# Altium PCB Copy of Copy of keyMANDevices_ver 2.PcbDoc
Units mil, origin at the board's own origin, x right, y up, seen from the top; angles counter-clockwise.
Board outline 6000 x 4000 mil, 2 copper layers (Top Layer, Bottom Layer); 94 components, 86 nets, 368 pads, 14 vias.
Unrouted connection lines stored in the file: 171.
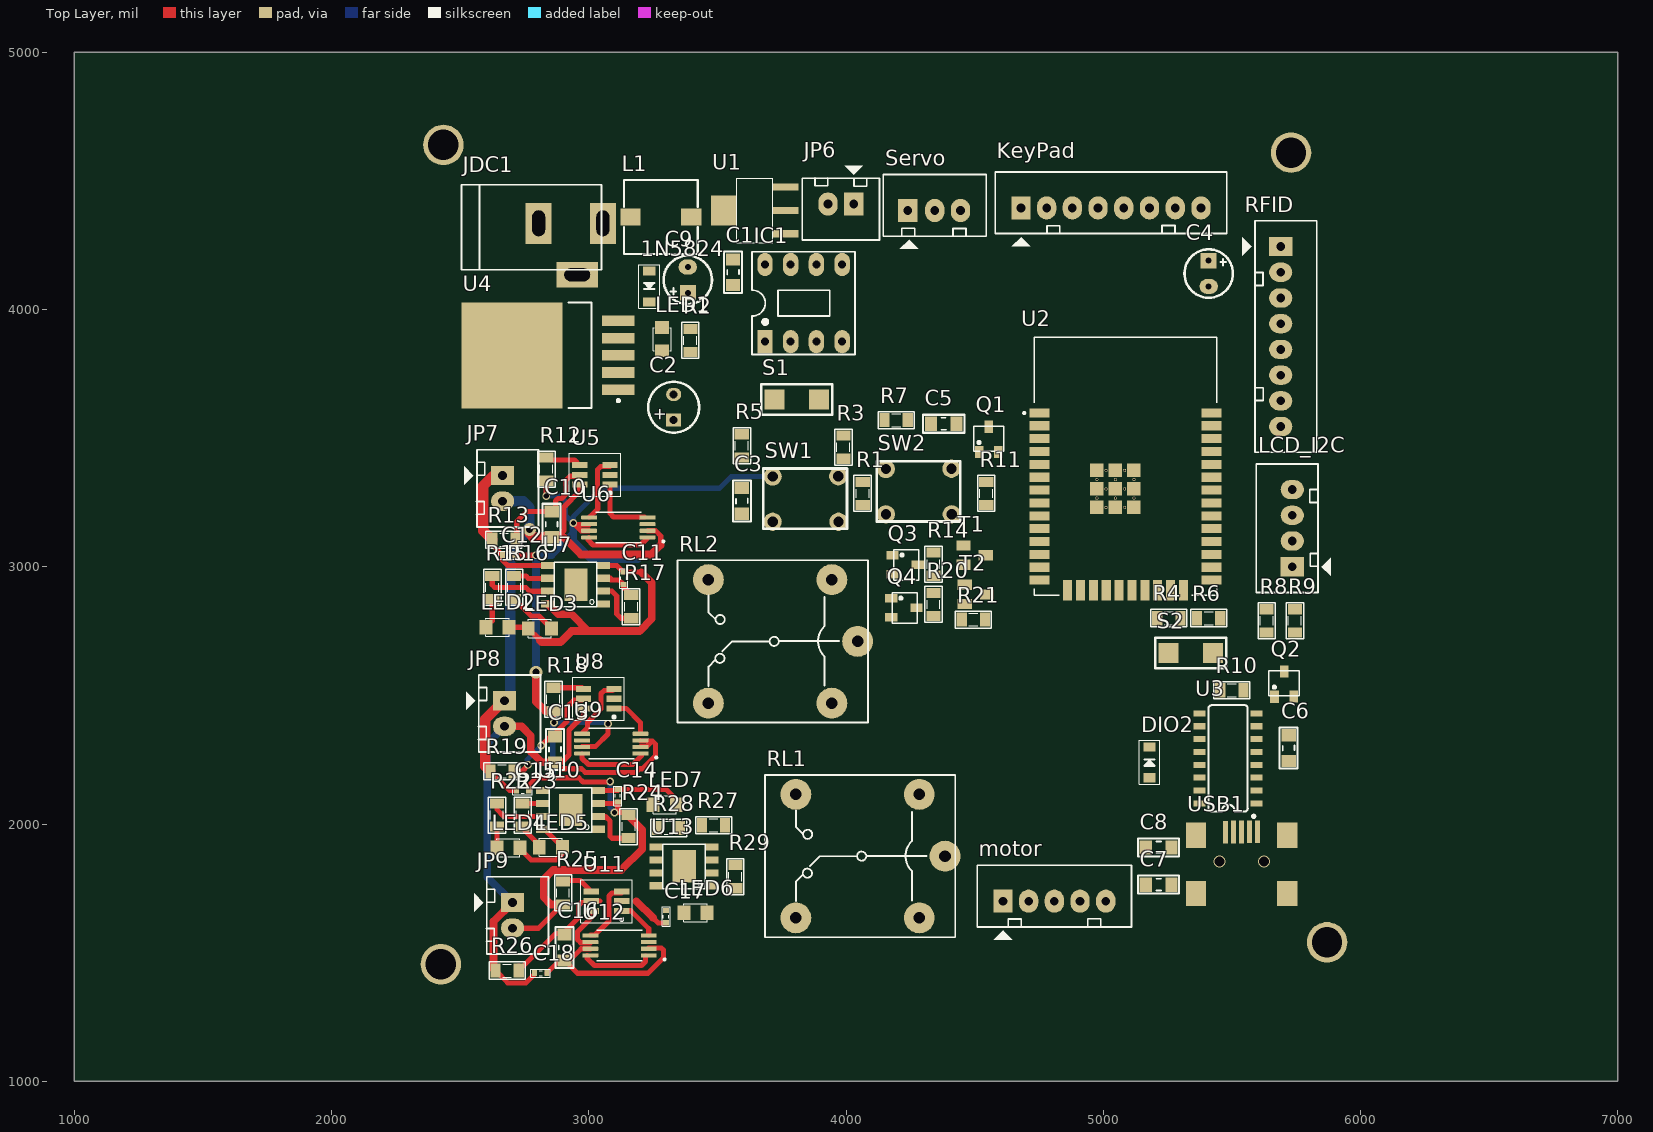
[diagram p0: Top Layer view]
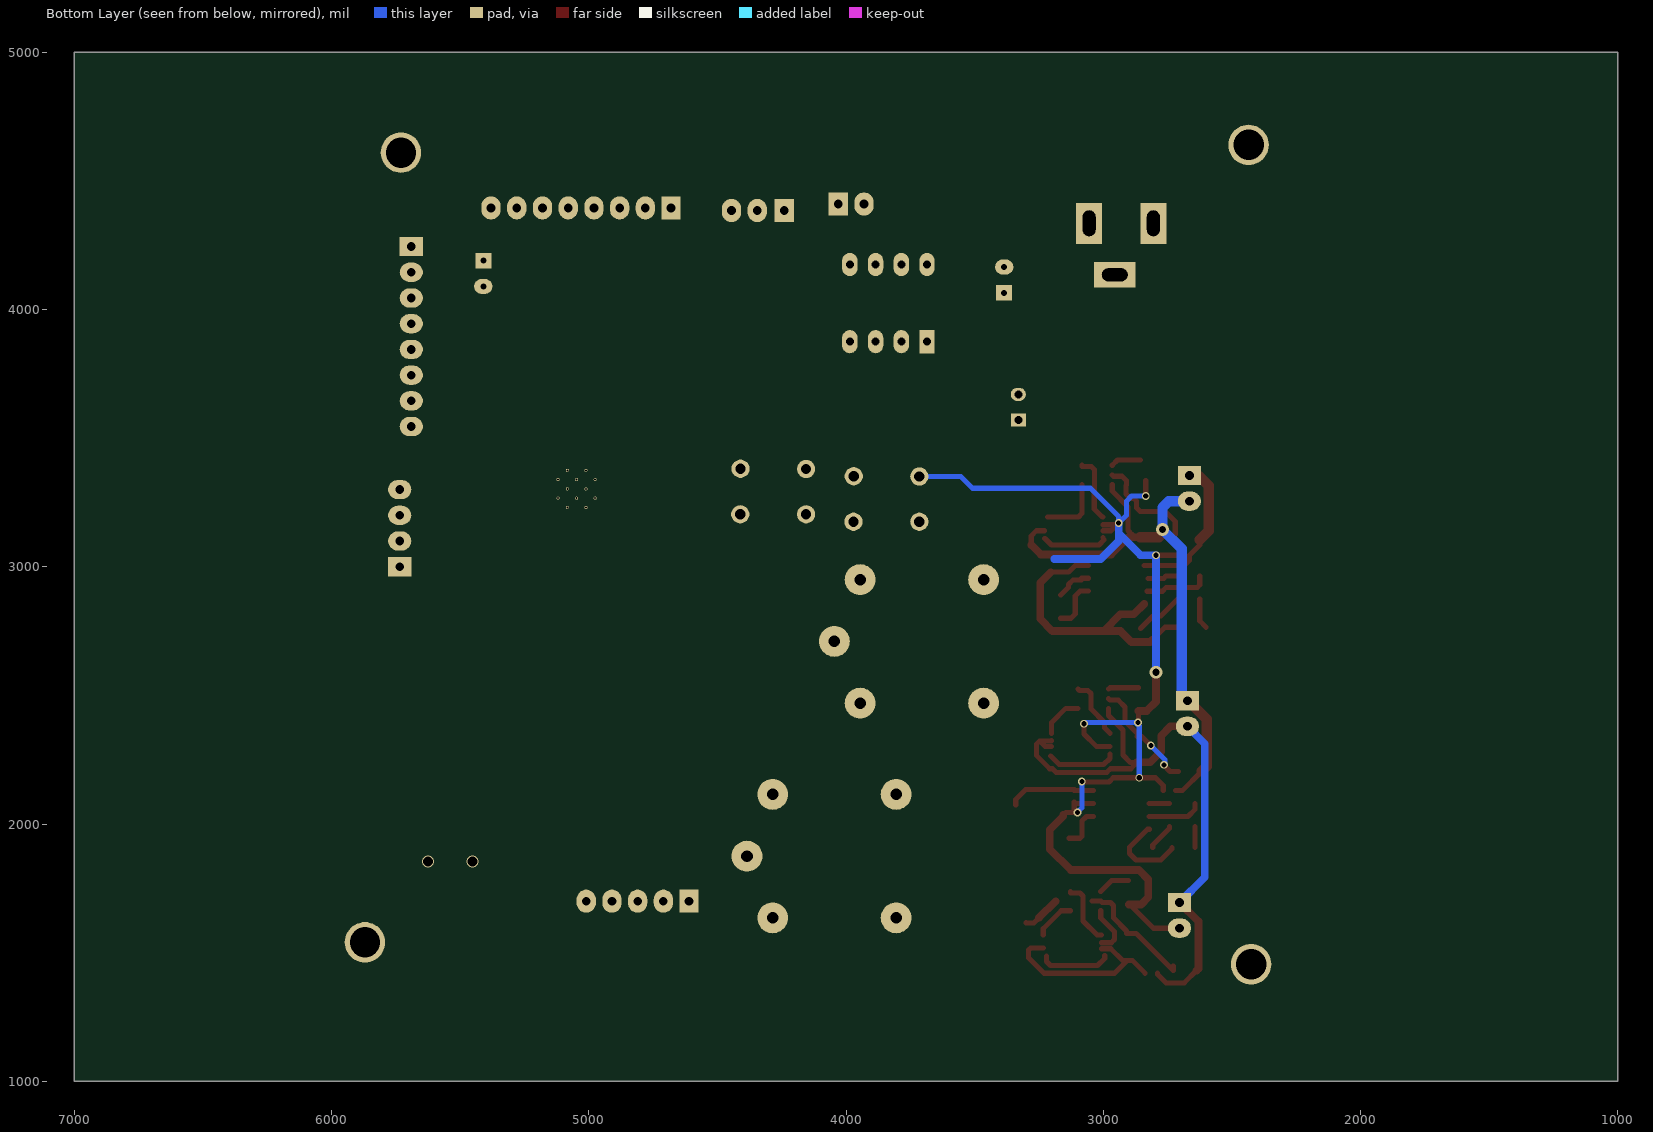
[diagram p1: Bottom Layer view, seen from below]

## Layer stack, top to bottom
Top Solder: solder mask 0.4, Solder Resist, Dk 3.5
Top Layer: signal copper 1.4
Dielectric 1: dielectric 12.6, FR-4, Dk 4.8
Bottom Layer: signal copper 1.4
Bottom Solder: solder mask 0.4, Solder Resist, Dk 3.5

## Board outline
1000,1000 7000,1000 7000,5000 1000,5000

## Design rules (kind name [scope] priority, off if disabled: settings)
Clearance [All] p1: gap=10 ignorepadtopadclearanceinfootprint=FALSE except(0: Arc-Hole Track-Hole SMDPad-Hole THPad-Hole Via-Hole Fill-Hole Poly-Hole Region-Hole Text-Hole)
PolygonConnect [All] p1: connectstyle=Relief reliefconductorwidth=10 reliefentries=4 polygonreliefangle="90 Angle" airgapwidth=10
RoutingVias [All] p1: holewidth=16 width=24 viastyle="Through Hole" minholewidth=16 minwidth=24 maxholewidth=16 maxwidth=24
SolderMaskExpansion [All] p1: expansion=4
Width [All] p1: maxlimit=40 minlimit=20 preferedwidth=30
30 further rules are at their usual default settings.

## Components (designator, comment, footprint, x,y, rotation, side; value= is the part's Value field where it differs from the comment)
1N5824 "Diode SMD" DIO-SMD-123 3235,4090 r90 top value=1N5007
C1 "104" CAP_0805 3560,4145 r90 top value=33p
C2 "680 uF" C5mm 3330,3620 r90 top
C3 "100nF" CAP_0805 3596,3256.14 r270 top value=33p
C4 "Cap Pol" C3MM 5410,4140 r270 top
C5 "100nF" CAP_0805 4380,3555 r180 top value=33p
C6 "104" CAP_0805 5720,2295 r90 top value=33p
C7 "104" CAP_0805 5215,1765 r0 top value=33p
C8 "104" CAP_0805 5215,1910 r0 top value=33p
C9 "220 uF" C3MM 3385,4115 r90 top
C10 "0.1 uF" CAP_0805 2855,3165 r90 top value=33p
C11 "10 uF" CAP_0402 3135,2955 r270 top value=33p
C12 "10 uF" CAP_0402 2689,3044.78 r0 top value=33p
C13 "0.1 uF" CAP_0805 2867.6,2289.57 r90 top value=33p
C14 "10 uF" CAP_0402 3112.6,2109.57 r270 top value=33p
C15 "10 uF" CAP_0402 2742.6,2129.57 r0 top value=33p
C16 "0.1 uF" CAP_0805 2905,1520 r90 top value=33p
C17 "10 uF" CAP_0402 3300,1640 r270 top value=33p
C18 "10 uF" CAP_0402 2813,1420 r0 top value=33p
DIO2 "Diode SMD" DIO-SMD-123 5180,2240 r270 top value=1N5007
IC1 "LM741" DIP8/W0.3 3685,3875 r0 top
JDC1 "Jac DC" DC-IN 2930,4235 r0 top
JP6 "JP2" CON2 4030,4410 r180 top value="Connector 2"
JP7 "JP2" CON2 2665,3355 r270 top value="Connector 2"
JP8 "JP2" CON2 2672.6,2479.57 r270 top value="Connector 2"
JP9 "JP2" CON2 2703.6,1695 r270 top value="Connector 2"
KeyPad "KeyPad" CON8 4680,4395 r0 top value="Connector 8"
L1 "33 uH" L-SMD-M-7.3x4.5 3280,4360 r270 top
LCD_I2C "LCD_I2C" CON4 5735,3000 r90 top value="Connector 4"
LED1 "LED" LED-0805-Red 3285,3840 r90 top value="LED 3 ly Single Colour"
LED2 "LED" LED-0805-Red 2690,2765 r180 top value="LED 3 ly Single Colour"
LED3 "LED" LED-0805-Green 2765,2760 r0 top value="LED 3 ly Single Colour"
LED4 "LED" LED-0805-Red 2732.6,1907.95 r180 top value="LED 3 ly Single Colour"
LED5 "LED" LED-0805-Green 2897.6,1909.57 r180 top value="LED 3 ly Single Colour"
LED6 "LED" LED-0805-Red 3370,1655 r0 top value="LED 3 ly Single Colour"
LED7 "LED" LED-0805-Green 3340,2075 r180 top value="LED 3 ly Single Colour"
motor "motor" CON5 4610,1700 r0 top value="Connector 5"
Q1 "2N222" SOT23D 4555,3495 r0 top value=C1815
Q2 "2N222" SOT23D 5703,2544 r0 top value=C1815
Q3 "2N222" SOT23D 4230,3007.37 r270 top value=C1815
Q4 "2N222" SOT23D 4225,2840 r270 top value=C1815
R1 "10k" RES-SMD-0805 4065,3285 r270 top
R2 "1k" RES-SMD-0805 3395,3880 r270 top
R3 "12k" RES-SMD-0805 3990,3465 r90 top
R4 "12k" RES-SMD-0805 5255,2800 r180 top
R5 "470" RES-SMD-0805 3595,3470 r90 top
R6 "470" RES-SMD-0805 5410,2800 r180 top
R7 "10k" RES-SMD-0805 4195,3570 r0 top
R8 "470" RES-SMD-0805 5635,2790 r90 top
R9 "470" RES-SMD-0805 5745,2790 r90 top
R10 "12k" RES-SMD-0805 5500,2520 r0 top
R11 "12k" RES-SMD-0805 4545,3285 r90 top
R12 "1k" RES-SMD-0805 2835,3379.62 r90 top
R13 "100" RES-SMD-0805 2670,3105 r180 top
R14 "1k" RES-SMD-0805 4340,3010 r90 top
R15 "1k" RES-SMD-0805 2625,2919.5 r90 top
R16 "1k" RES-SMD-0805 2710,2919.5 r90 top
R17 "1.2k" RES-SMD-0805 3165,2845 r270 top
R18 "1k" RES-SMD-0805 2862.6,2484.57 r90 top
R19 "100" RES-SMD-0805 2662.6,2204.57 r180 top
R20 "1k" RES-SMD-0805 4340,2853.47 r90 top
R21 "1k" RES-SMD-0805 4495,2795 r0 top
R22 "1k" RES-SMD-0805 2642.6,2034.57 r90 top
R23 "1k" RES-SMD-0805 2742.6,2034.57 r90 top
R24 "1.2k" RES-SMD-0805 3155,1990 r270 top
R25 "1k" RES-SMD-0805 2900,1731.81 r90 top
R26 "100" RES-SMD-0805 2682.6,1430 r180 top
R27 "1k" RES-SMD-0805 3485,1995 r180 top
R28 "1k" RES-SMD-0805 3310,1985 r0 top
R29 "1.2k" RES-SMD-0805 3570,1795 r270 top
RFID "RFID" CON8 5690,4245 r270 top value="Connector 8"
RL1 "Relay 10A/12V" RL_SPDT_10A 4385,1875 r180 top value="Relay SPDT, 10A, 12V"
RL2 "Relay 10A/12V" RL_SPDT_10A 4045,2710 r180 top value="Relay SPDT, 10A, 12V"
S1 "SW-SMD" "SW 3x2x4" 3808.39,3650 r0 top
S2 "SW-SMD" "SW 3x2x4" 5340,2665 r180 top
Servo "servo" CON3 4245,4385 r0 top value="Connector 3"
SW1 "SW-4P-S" SW-4P-S 3715,3351 r0 top
SW2 "SW-4P-S" SW-4P-S 4155,3380 r0 top
T1 "A03401" A3401 4500,3045 r270 top
T2 "A03401" A3401 4505,2892.84 r270 top
U1 "LM1117-ADJ" LM1117-SOP 3715,4385 r90 top
U2 "ESP32-WROOM-32" MODULE_ESP32-WROOM-32 5086.61,3390.94 r0 top
U3 "CH340C" SO016 5485,2255 r90 top
U4 "LM2976" TO-263 2878.78,3821.93 r180 top
U5 "DW01A" SOT23-6 3024.06,3357.4 r180 top
U6 "FS8205A" FS8205A 3114.87,3155 r180 top
U7 "TP4056" TP4056 2949,2930.24 r180 top
U8 "DW01A" SOT23-6 3038.54,2486.97 r180 top
U9 "FS8205A" FS8205A 3087.6,2314.57 r180 top
U10 "TP4056" TP4056 2929.33,2054.57 r180 top
U11 "DW01A" SOT23-6 3068.82,1700 r180 top
U12 "FS8205A" FS8205A 3120,1530 r180 top
U13 "TP4056" TP4056 3370,1835 r180 top
USB1 "USB_M" USB_B_MINI_SMD 5476,1968 r180 top

## Footprints (in the part's own frame and the unit in brackets; to place one, negate y for a bottom-side part, rotate by r counter-clockwise, add the part's x,y. Pads: shape width x height; smd on the part's side, far side on the other; paste and mask are expansions set on the pad)
A3401 [mm] "P-Channel 30V 4A _Ta_ 1.4W _Ta_ Surface Mount SOT-23-3"
  rect 1x1.4 smd: 1(-0.95,-1.1) 2(0.95,-1.1) 3(0,1.1)
  body extent -1.47,-1.33 1.53,1.17, height 1.06
C3MM [mm]
  rect 1.5x1.58 hole 0.6: 1(-1.27,0)
  oval 1.5x1.8 hole 0.6: 2(1.27,0)
  silkscreen extent -2.39,-2.39 2.39,2.39, body extent -2,-2.03 1.99,1.97, height 7.01
C5mm [mm]
  rect 1.3x1.5 hole 0.8: 1(-1.27,0)
  oval 1.3x1.5 hole 0.8: 2(1.27,0)
  silkscreen extent -2.51,-2.51 2.51,2.51, body extent -2.5,-2.5 2.49,2.5, height 11.01
CAP_0402 [mm]
  rect 0.5x0.6 smd: 1(-0.61,0) 2(0.61,0)
  silkscreen extent -0.97,-0.38 0.97,0.41, body extent -0.5,-0.27 0.5,0.26, height 0.35
CAP_0805 [mm]
  rect 1.2x1.4 smd: 1(-1.27,-0.025) 2(1.27,-0.025)
  silkscreen extent -2.03,-0.91 2.03,0.86, body extent -1.01,-0.66 1.01,0.61, height 0.61
CON2 [mil] "CON2"
  rect 75x90 hole 34: 1(0,0)
  oval 75x90 hole 34: 2(100,0)
  silkscreen extent -100,-150 200,140, body extent -68,-70 168,107, height 236
CON3 [mil] "CON 3"
  rect 75x90 hole 34: 1(-5,0)
  oval 75x90 hole 34: 2(100,0) 3(200,0)
  silkscreen extent -100,-150 300,140, body extent -95,-90 295,136, height 276
CON4 [mil] "CON4"
  rect 75x90 hole 34: 1(0,0)
  oval 75x90 hole 34: 2(100,0) 3(200,0) 4(300,0)
  silkscreen extent -100,-150 400,140, body extent -90,-90 398,136, height 276
CON5 [mil] "CON5"
  rect 75x90 hole 34: 1(0,0)
  oval 75x90 hole 34: 2(100,0) 3(200,0) 4(300,0) 5(400,0)
  silkscreen extent -100,-150 500,140
CON8 [mil] "CON8"
  rect 75x90 hole 34: 1(0,0)
  oval 75x90 hole 34: 2(100,0) 3(200,0) 4(300,0) 5(400,0) 6(500,0) 7(600,0) 8(700,0)
  silkscreen extent -100,-150 800,140
DC-IN [mil] "Jac DC input"
  rect 100x160 hole 50 slot 100 at 90 deg: 1(125,100) 2(-125,100)
  rect 160x100 hole 50 slot 100 at 0 deg: 3(25,-100)
  silkscreen extent -425,-80 120,250, body extent -410,-105 134,269, height 434
DIO-SMD-123 [mm]
  rect 0.9x1.2 smd: 1(1.524,0) 2(-1.524,0)
  silkscreen extent -2.16,-1.02 2.16,1.02, body extent -1.76,-0.8 1.94,0.8, height 1.25
DIP8/W0.3 [mil] "8 PIN, W 300mil, Pin to pin 100mil"
  rect 60x90 hole 31: 1(0,0)
  oval 60x90 hole 31: 2(100,0) 3(200,0) 4(300,0) 5(300,300) 6(200,300) 7(100,300) 8(0,300)
  silkscreen extent -50,-50 350,350, body extent -50,-40 350,336, height 201
FS8205A [mm]
  rrect25% 1.56x0.4 smd: 1(-2.88,1.031) 2(-2.88,0.381) 3(-2.88,-0.269) 4(-2.88,-0.919) 5(2.88,-0.919) 6(2.88,-0.269) 7(2.88,0.381) 8(2.88,1.031)
  silkscreen extent -4.54,-1.46 2.25,1.57, body extent -3.2,-1.4 3.2,1.53, height 1.2
L-SMD-M-7.3x4.5 [mm] "WE-PDA SMD Shielded Power Inductor, 7345"
  rect 1.7x2 smd: 1(0,3) 2(0,-3)
  silkscreen extent -3.65,-3.65 3.65,3.65, body extent -3.65,-3.65 3.65,3.65, height 4.05
LED-0805-Green [mil]
  rect 50x55 smd: 1(0,0) 2(90,0)
  silkscreen extent 0,-35 90,35, body extent 5,-25 85,25, height 43
LED-0805-Red [mil]
  rect 50x55 smd: 1(0,0) 2(90,0)
  silkscreen extent 0,-35 90,35, body extent 5,-25 85,25, height 43
LM1117-SOP [mm]
  rect 0.7x2.54 smd: 1(-2.3,-1.27) 2(0,-1.27) 3(2.3,-1.27)
  rect 3x2.54 smd: 2(0,4.826)
  silkscreen extent -3.18,0 3.17,3.56, body extent -3.25,-1.78 3.25,5.18, height 1.68
MODULE_ESP32-WROOM-32 [mm]
  rect 2x0.9 smd: 1(-8.5,5.26) 2(-8.5,3.99) 3(-8.5,2.72) 4(-8.5,1.45) 5(-8.5,0.18) 6(-8.5,-1.09) 7(-8.5,-2.36) 8(-8.5,-3.63) 9(-8.5,-4.9) 10(-8.5,-6.17) 11(-8.5,-7.44) 12(-8.5,-8.71) 13(-8.5,-9.98) 14(-8.5,-11.25) 25(8.5,-11.25) 26(8.5,-9.98) 27(8.5,-8.71) 28(8.5,-7.44) 29(8.5,-6.17) 30(8.5,-4.9) 31(8.5,-3.63) 32(8.5,-2.36) 33(8.5,-1.09) 34(8.5,0.18) 35(8.5,1.45) 36(8.5,2.72) 37(8.5,3.99) 38(8.5,5.26)
  rect 0.9x2 smd: 15(-5.715,-12.25) 16(-4.445,-12.25) 17(-3.175,-12.25) 18(-1.905,-12.25) 19(-0.635,-12.25) 20(0.635,-12.25) 21(1.905,-12.25) 22(3.175,-12.25) 23(4.445,-12.25) 24(5.715,-12.25)
  rect 1.33x1.33 smd: 39_1(-2.835,-0.405) 39_2(-1,-0.405) 39_3(0.835,-0.405) 39_4(-2.835,-2.24) 39_5(-1,-2.24) 39_6(0.835,-2.24) 39_7(-2.835,-4.075) 39_8(-1,-4.075) 39_9(0.835,-4.075)
  round 0.3 hole 0.2: 39_10(-1.917,-0.405) 39_11(-0.082,-0.405) 39_12(-2.835,-1.322) 39_13(-1,-1.322) 39_14(0.835,-1.322) 39_15(-1.917,-2.24) 39_16(-0.082,-2.24) 39_17(-2.835,-3.157) 39_18(-1,-3.157) 39_19(0.835,-3.157) 39_20(-1.917,-4.075) 39_21(-0.082,-4.075)
  silkscreen extent -10.1,-12.75 9,12.75, body extent -10.54,-12.75 8.98,12.75, height 3.2
RES-SMD-0805 [mil]
  rect 39.37x55 smd: 1(-45,0) 2(45,0)
  silkscreen extent -70,-34 70,33, body extent -39,-25 39,25, height 31
RL_SPDT_10A [mil] "Relay SPDT, 5 pin, 10A,W 650mil, L 800mil, H 800mil"
  round 120 hole 45: 1(0,0) 2(580,240) 3(580,-240) 4(100,-240) 5(100,240)
  silkscreen extent -40,-315 700,315
SO016 [mm]
  rect 0.6x1.2 smd: 1(-4.445,-2.8) 2(-3.175,-2.8) 3(-1.905,-2.8) 4(-0.635,-2.8) 5(0.635,-2.8) 6(1.905,-2.8) 7(3.175,-2.8) 8(4.445,-2.8) 9(4.445,2.8) 10(3.175,2.8) 11(1.905,2.8) 12(0.635,2.8) 13(-0.635,2.8) 14(-1.905,2.8) 15(-3.175,2.8) 16(-4.445,2.8)
  silkscreen extent -5.84,-2.67 5.26,1.95
SOT23-6 [mm] "SOT23, 5-Leads, Body 3.0x3.0mm (max), Pitch 0.95mm, IPC Medium Density"
  rect 1.5x0.6 smd: 1(-1.5,0.95) 2(-1.5,0) 3(-1.5,-0.95) 4(1.5,-0.95) 5(1.5,0) 6(1.5,0.95)
  silkscreen extent -2.54,-2.11 2.54,2.11, body extent -1.75,-1.52 1.75,1.53, height 1.45
SOT23D [mm] "SOT 23C - 1-3-2 - BCE"
  rect 0.85x1.2 smd: 1(-0.95,-1.25) 2(0.94,-1.245) 3(0,1.25)
  silkscreen extent -1.5,-1.14 1.5,1.32, body extent -1.5,-1.17 1.5,1.33, height 1.06
"SW 3x2x4" [mm]
  rect 2x2 smd: 1(-2.2,0) 2(2.2,0)
  silkscreen extent -3.5,-1.5 3.5,1.5, body extent -2.45,-1.45 2.45,1.45, height 2
SW-4P-S [mm]
  round 1.8 hole 1: 1(0,0) 2(0,-4.47) 3(6.502,-4.47) 4(6.477,0.025)
  silkscreen extent -0.91,-5.18 7.34,0.79, body extent -0.86,-5.23 7.35,0.76, height 9.52
TO-263 [mm]
  rect 3.2x1.05 smd: 1(-6,3.4) 2(-6,1.7) 3(-6,0) 4(-6,-1.7) 5(-6,-3.4)
  rect 10x10.45 smd: 6(4.5,0)
  silkscreen extent -6.13,-5.2 -1.1,5.2, body extent -6.58,-5.2 7.57,5.2, height 4.65
TP4056 [mm]
  rect 1.3x0.7 smd: 1(-2.75,1.905) 2(-2.75,0.635) 3(-2.75,-0.635) 4(-2.75,-1.905) 5(2.75,-1.905) 6(2.75,-0.635) 7(2.75,0.635) 8(2.75,1.905)
  rect 2.3x3.2 smd: GND(-0.025,0)
  silkscreen extent -2.1,-2.2 2.1,2.2, body extent -3.13,-2.45 2.87,2.45, height 1.75
USB_B_MINI_SMD [mm]
  rect 2x2.5 smd: 0(-6.075,0.305) 0(-6.071,6.045) 0(2.925,0.305) 0(2.929,6.045)
  rect 0.5x2.25 smd: 1(0,0) 2(-0.787,-0.013) 3(-1.575,-0.025) 4(-2.362,-0.038) 5(-3.15,-0.051)
  body extent -6.92,-0.37 3.78,8.83, height 3.95

## Part data
1N5824 DIO2: "Default Diode", Code - JEDEC=DO-214-AB, Published=8-Jun-2000, Publisher="Altium Limited", Revision="July-2002: Re-released for DXP Platform."
C1 C3 C5 C6 C7 C8 C10 C11 C12 C13 C14 C15 C16 C17 C18: library part CapSMD, "Capacitor", LatestRevisionDate=17-Jul-2002, LatestRevisionNote="Re-released for DXP Platform.", PackageReference=RAD-0.3, Published=8-Jun-2000, Publisher="Altium Limited"
C2 C9: library part "Cap Pol", "Polarized Capacitor (Axial)", LatestRevisionDate=17-Jul-2002, LatestRevisionNote="Re-released for DXP Platform.", PackageReference=POLAR0.8, Published=8-Jun-2000, Publisher="Altium Limited"
C4: "Polarized Capacitor (Axial)", LatestRevisionDate=17-Jul-2002, LatestRevisionNote="Re-released for DXP Platform.", PackageReference=POLAR0.8, Published=8-Jun-2000, Publisher="Altium Limited"
IC1: "Single OA"
JDC1: library part DCIN, "Jac DC input"
JP6 JP7 JP8 JP9: library part Con2, "Connector 2"
KeyPad RFID: library part Con8, "Connector 8"
L1: library part L-SMD-1, Inductance="1.0 µH", Manufacturer="Wurth Elektronik", partNo=78477010, ComponentLink1Description=Manufacturer, ComponentLink1URL=http://www.we-online.de, ComponentLink2Description=Datasheet, ComponentLink2URL=http://katalog.we-online.de/pbs/datasheet/78477010.pdf, Created by="Baojun Chen", Created Date=Nov.2015
LCD_I2C: library part Con4, "Connector 4"
LED1 LED2 LED3 LED4 LED5 LED6 LED7: "LED Single colour Green and Red"
motor: library part Con5, "Connector 5"
Q1 Q2 Q3 Q4: "NPN 600mW, ECB", =C2383
R1 R2 R3 R4 R5 R6 R7 R8 R9 R10 R11 R12 R13 R14 R15 R16 R17 R18 R19 R20 R21 R22 R23 R24 R25 R26 R27 R28 R29: library part "Resistor - SMD", "Resistor", Manufacturer="Generic Components", Class=Passive, Published=08/06/2000, Publisher="Altium Hobart Technology Centre"
RL1 RL2: library part "Relay 1", "Relay SPDT,10A - 12VDC 5 Pin", ="Relay SPDT, 10A, 24V"
S1 S2: "Switch", LatestRevisionDate=17-Jul-2002, LatestRevisionNote="Re-released for DXP Platform.", PackageReference=SPST-2, Published=24-Mar-1999, Publisher="Altium Limited"
Servo: library part Con3, "Connector 3"
SW1 SW2: library part SW-4PIN-SMALL, "Switch Small 4 Pin", LatestRevisionDate=17-Jul-2002, LatestRevisionNote="Re-released for DXP Platform.", PackageReference=SPST-2, Published=24-Mar-1999, Publisher="Altium Limited"
T1 T2: "P-Channel 30V 4A _Ta_ 1.4W _Ta_ Surface Mount SOT-23-3"
U1: "800mA Low-Dropout Linear Regulator", Creator="Nguyen Ba Bien", Website=http://group3i.net
U2: "Bluetooth, WiFi Transceiver Module 2.4GHz ~ 2.5GHz Surface Mount", Package="Module Espressif Systems", Digi-Key_Part_Number=1904-1010-1-ND, Digi-Key_Purchase_URL=https://www.digikey.com/product-detail/en/espressif-systems/ESP32-WROOM-32/1904-1010-1-ND/8544305?utm_source=snapeda&utm_medium=aggregator&utm_campaign=symbol, MF="Espressif Systems", MP=ESP32-WROOM-32, SnapEDA_Link=https://www.snapeda.com/parts/ESP32-WROOM-32/Espressif%20Systems/view-part/2753322/?ref=snap
U3: "USB to serial chip CH340", Package=Package, Availability=Unavailable, Check_prices=https://www.snapeda.com/parts/CH340C/WCH/view-part/5428851/?ref=eda, MF=WCH, MP=CH340C, Price=None, SnapEDA_Link=https://www.snapeda.com/parts/CH340C/WCH/view-part/5428851/?ref=snap
U4: library part LM2596, Max Input Voltage="12 V", Max Output Current="3 (6.0 peak) A", Max Output Voltage=mV, Temperature Range="-40 to +125 degC", Category=IC-Power, Min Input Voltage=mV, Min Output Voltage=mV, Mounting Technology="Surface Mount", Status=Unreleased, Supply Voltage=mV
U5 U8 U11: "One Cell Lithium-ion/Polymer Battery Protection IC"
U7 U10 U13: "Complete single cell Li-Ion battery with a constant current / constant voltage linear charger"

## Free pads (board coordinates)
  round 157.48 hole 118.11: 6(5730,4610) 7(5870,1540) 8(2425,1455) 9(2435,4640)

## Via types
v1: diameter 30, hole 20, Top Layer to Bottom Layer, 10 vias
v2: diameter 50, hole 28, Top Layer to Bottom Layer, 2 vias
v3: diameter 47.24, hole 39.37, Top Layer to Bottom Layer, 2 vias

## Nets (pads, with @x,y where several pads share a name; then routed paths per layer and width w, separated by ;. In a path a pad name is that pad's centre, name@x,y a point inside that pad or via, vN(x,y) a via of type N, cw(c..) or ccw(c..) an arc to the next point about the centre after c; other vN are vias at no path point)
AccessPoint: C5.2 R7.2 SW2.2 SW2.3 U2.7
ADC2_CH8: C13.1 C18.1 JP8.2 JP9.1 R26.2 U2.10 U8.6 U9.2 U9.3 U13.5 | length 2414.2
  Top Layer w20: R26.2 2685.1,1382.5 2755.57,1382.5 2789,1415.93 C18.1 ; C13.1 2893.17,2215 2971.78,2215 2986,2200.79 3183.22,2200.79 3197.43,2215 3207.72,2215 3260,2267.28 3260,2310 3247.12,2322.88 ; C13.1@2869.07,2239.57 2894.57,2239.57 2923.5,2268.5 2923.5,2365.76 2979.49,2421.74 U8.6 ; U9.2@3200.98,2301.85 3226.1,2301.85 3247.12,2322.88 ; U9.3 3200.98,2322.88 3247.12,2322.88
  Top Layer w30: R26.2 2630,1437.6 2630,1621.4 JP9.1 ; JP8.2 2738.46,2379.57 2775,2343.03 2775,2282.07 2817.5,2239.57 C13.1
  Bottom Layer w30: JP8.2 2605,2311.97 2605,1793.6 JP9.1 JP9.1@2690,1695
BOOT: Q2.3 R4.1 R6.2 U2.25
COL1: KeyPad.5 U2.24
COL2: KeyPad.6 U2.26
COL3: KeyPad.7 U2.27
COL4: KeyPad.8 U2.28
Control: C3.2 R1.2 SW1.2 SW1.3 U2.6
control1: R14.2 T1.1 U2.11
control2: R20.2 T2.1 U2.12
"Control Charge": IC1.6 RL2.4
DTR: Q2.2 R10.2 U3.13
EN: Q1.3 R3.1 R5.2 U2.3
Encoder: motor.3 U2.9
G11: U5.1 U6.4 | length 252.3
  Top Layer w20: U5.1 3083.11,3206.89 3096.54,3193.46 U6.4@3216.77,3193.46
G12: U8.1 U9.4 | length 167.4
  Top Layer w20: U8.1 3145.43,2449.57 3200.98,2394.02 U9.4@3200.98,2353.03
G13: U11.1 U12.4 | length 158.6
  Top Layer w20: U11.1 3163.38,1662.6 3233.39,1592.6 U12.4@3233.39,1568.46
G21: U5.3 U6.5 | length 259.6
  Top Layer w20: U6.5@3001.49,3193.46 3003.46,3193.46 3035,3225 3035,3298.49 3033.58,3299.9 3033.58,3377.5 3045.3,3389.21 3083.11,3389.21 U5.3
G22: U8.3 U9.5 | length 241.3
  Top Layer w20: U9.5@2974.21,2353.03 2995,2373.82 2995,2394.83 3048.07,2447.9 3048.07,2507.07 3059.79,2518.78 3092.01,2518.78 U8.3
G23: U11.3 U12.5 | length 251.2
  Top Layer w20: U12.5@3006.61,1568.46 3023.46,1568.46 3078.34,1623.35 3078.34,1720.1 3090.06,1731.81 3127.87,1731.81 U11.3
GND: 1N5824.1 C1.1 C2.2 C3.1 C4.2 C5.1 C6.1 C7.1 C8.1 C9.2 C11.2 C12.2 C14.2 C15.2 C16.1 C17.2 C18.2 IC1.2 JDC1.2 JDC1.3 JP6.2 JP9.2 LCD_I2C.1 LED1.2 motor.5 R12.1 R17.1 R18.1 R21.2 R24.1 R25.1 R29.1 RFID.3 RL1.5 RL2.5 S1.2 S2.2 Servo.3 SW1.1 SW1.4 SW2.1 SW2.4 U1.1 U2.1 U2.15 U2.38 U2.39_1 U2.39_2 U2.39_3 U2.39_4 U2.39_5 U2.39_6 U2.39_7 U2.39_8 U2.39_9 U2.39_10 U2.39_11 U2.39_12 U2.39_13 U2.39_14 U2.39_15 U2.39_16 U2.39_17 U2.39_18 U2.39_19 U2.39_20 U2.39_21 U3.1 U4.3 U4.5 U6.6 U6.7 U7.3 U9.6 U9.7 U10.3 U11.6 U12.2 U12.3 U12.6 U12.7 U13.3 USB1.5 | length 5943.9
  Top Layer w20: JP9.2 2805,1595 R25.1@2883.22,1673.22 ; C12.2 v1(2795,3044.78) ; C15.2 2766.6,2150 2796.6,2180 v1(2860,2180) 2960.91,2180 2977.34,2163.57 v1@3083.11,2163.57 ; v1(2835,3275) R12.1 ; C18.2 2887,1470 C16.1 ; R18.1 2862.6,2402.08 v1@2865,2399.68 ; v1(2940,3170) v1@2946.69,3163.31 ; U9.7@2974.21,2301.85 3026.85,2301.85 3075,2350 v1(3075,2390) ; U6.7 2970,3140 v1@2946.69,3163.31 ; U6.6@3001.49,3163.31 v1@2946.69,3163.31 ; U12.7 2970.59,1515 2925.59,1470 C16.1 ; U12.6@3006.61,1538.31 2968.77,1538.31 2955.91,1551.18 2955.91,1581.19 3009.76,1635.04 U11.6 ; U10.3 3106.6,2079.57 C14.2 3112.6,2057.6 v1(3100,2045) 3145,2045 R24.1 ; U7.3 3084.76,2955.24 3084.76,2949.16 3116.84,2949.16 C11.2 3135,2920 R17.1 ; U12.2@3233.39,1517.28 3282.67,1517.28 3290,1509.96 3290,1480 3230,1420 2956,1420 C16.1 ; 3250,1635 3270,1615 3299,1615 C17.2
  Top Layer w30: v2(2795,2590) 2795,2475 2830.43,2439.57 R18.1 ; R25.1 2853.19,1686.81 2825,1715 2825,1784.35 2862.14,1821.49 3126.49,1821.49 3207.5,1902.5 3207.5,1977.54 3155,2030.04 R24.1 ; 3185.03,1699.97 3250,1635
  Bottom Layer w20: v1(2835,3275) 2890,3275 2910,3255 2910,3200 v1@2932.5,3177.5 ; v1(2860,2180) 2860,2380 2870,2390 v1(2865,2395) 3070,2395 v1(3075,2390) ; v1(2940,3170) 2940,3195 3050,3305 3508,3305 3554,3351 SW1.1 ; v1(3083.11,2165) 3083.11,2063.11 3100,2046.22 v1(3100,2045)
  Bottom Layer w30: v2@2795,2600 v1(2795,3044.78) 2854.78,3044.78 2940,3130 ; v1(2940,3170) 2940,3130 ; 3190,3030 3010,3030 2940,3100 2940,3130
IRQ: RFID.4
Led3: LED7.2 R28.1
MISO: RFID.5 U2.31
MOSI: RFID.6 U2.37
motor1: motor.2 T1.2
motor2: motor.1 T2.2
Net1N5824_2: 1N5824.2 L1.1 U4.2
NetC6_2: C6.2 U3.4
NetC10_2: C10.2 R13.1 U5.5 | length 419.4
  Top Layer w20: R13.1@2720,3125 2720,3176.4 2758.6,3215 C10.2 2870,3229 2870,3255.77 2880,3265.77 2894.02,3265.77 2911.6,3283.35 2911.6,3315.68 2910,3317.28 2910,3334.62 2927.19,3351.81 2959.41,3351.81 U5.5
NetC13_2: C13.2 R19.1 U8.5 | length 445.4
  Top Layer w20: R19.1 2740,2204.57 2763.6,2228.17 v1(2763.6,2230) ; v1(2815,2305) 2849.57,2339.57 C13.2 2862.66,2345.51 2862.66,2347.34 2893.5,2378.18 2915,2399.68 2915,2454.71 2941.68,2481.38 2973.9,2481.38 U8.5
  Bottom Layer w20: v1@2760,2235 2760,2250 v1(2815,2305)
NetC16_2: C16.2 R26.1 U11.5 | length 477.9
  Top Layer w20: R26.1@2727.6,1447.6 R26.1 2872.6,1575 2909.45,1575 2909.45,1584.45 2960.23,1635.24 2960.23,1682.69 2971.95,1694.41 3004.17,1694.41 U11.5 3042.75,1700
NetDIO2_1: DIO2.1 USB1.1
NetLED1_1: LED1.1 R2.2
NetLED2_2: LED2.2 R15.1 | length 119.9
  Top Layer w20: LED2.2 2625,2790 R15.1
NetLED3_2: LED3.2 R16.1 | length 192.4
  Top Layer w20: R16.1 2776.03,2808.46 2806.54,2808.46 LED3.2
NetLED4_2: LED4.2 R22.1 | length 81.6
  Top Layer w20: LED4.2 R22.1
NetLED5_2: LED5.2 R23.1 | length 106.9
  Top Layer w20: R23.1 2742.6,1983.44 2807.6,1918.44 LED5.2
NetLED6_2: LED6.2 R27.1
NetQ1_1: Q1.1 R10.1
NetQ2_1: Q2.1 R11.1
NetQ3_1: Q3.1 R14.1
NetQ4_1: Q4.1 R20.1
NetR5_1: R5.1 S1.1
NetR6_1: R6.1 S2.1
NetR8_1: R8.1 U3.2
NetR9_1: R9.1 U3.3
NetR12_2: R12.2 U5.4 | length 118.4
  Top Layer w20: R12.2@2855,3415 2944.8,3415 U5.4
NetR15_2: R15.2 U7.7 | length 250.3
  Top Layer w20: R15.2 2625,2929.18 2634.18,2920 2755,2920 2770,2905 U7.7@2830,2905
NetR16_2: R16.2 U7.6 | length 118.9
  Top Layer w20: R16.2 2755.5,2964.5 2765,2955 U7.6@2825,2955
NetR17_2: R17.2 U7.2 | length 192.1
  Top Layer w20: U7.2 3089.35,2905.24 3108.76,2885.84 3108.76,2816.24 3125,2800 R17.2
NetR18_2: R18.2 U8.4 | length 119
  Top Layer w20: R18.2 2974.29,2529.57 U8.4
NetR22_2: R22.2 U10.7 | length 212.4
  Top Layer w20: R22.2 2642.6,2057.04 2670.07,2029.57 U10.7
NetR23_2: R23.2 U10.6 | length 78.5
  Top Layer w20: R23.2 U10.6
NetR24_2: R24.2 U10.2 | length 165.3
  Top Layer w20: U10.2 3065.43,2029.57 3083.19,2011.81 3083.19,1951.81 3090.43,1944.57 R24.2@3132.53,1944.57
NetR25_2: R25.2 U11.4 | length 124.8
  Top Layer w20: R25.2@2902.6,1780 2967.16,1780 U11.4
NetR27_2: R27.2 U13.7
NetR28_2: R28.2 U13.6
NetR29_2: R29.2 U13.2
NetU6_1: U6.1 U6.8 | length 251.5
  Top Layer w20: 2996.49,3105 3016.71,3084.77 3200.91,3084.77 3226.13,3110 U6.1@3228.26,3110 ; U6.8@3001.49,3113.51 U6.8
NetU9_1: U9.1 U9.8 | length 271.7
  Top Layer w20: U9.8@2974.21,2271.7 2974.21,2255 2998.42,2230.79 3170.79,2230.79 3205,2265
NetU12_1: U12.1 U12.8 | length 277.8
  Top Layer w20: U12.8@2994.21,1489.41 2994.21,1477.64 3021.85,1450 3205,1450 3220.98,1465.98 U12.1@3220.98,1487.13
OUT+: C12.1 JP6.1 JP7.1 R13.2 RL1.2 U7.5 | length 596.3
  Top Layer w20: R13.2 2625,3084.77 C12.1 2665,3025 2684.76,3005.24 U7.5
  Top Layer w40: R13.2 2590,3140 2590,3314.62 2630.38,3355 JP7.1
pin: IC1.3 U2.8
PIN1-: C10.1 C15.1 JP7.2 JP8.1 R19.2 U5.6 U6.2 U6.3 U10.5 | length 2254
  Top Layer w20: R19.2 2692.6,2129.57 C15.1 ; C10.1@2880,3115 2887.33,3122.33 2887.33,3124.76 2903.56,3140.99 2903.56,3232.88 2965,3294.32 U5.6 ; U6.2 3260,3140 3280,3120 3280,3085
  Top Layer w30: C10.1 2880,3115 2902.19,3115 2969.16,3048.03 3243.03,3048.03 3280,3085
  Top Layer w40: R19.2 2597.6,2224.57 2597.6,2407.53 2669.64,2479.57 JP8.1 ; v2(2770,3145) 2770,3129.6 2784.6,3115 C10.1
  Bottom Layer w40: JP7.2 2745,3255 2770,3230 v2@2770,3155 ; JP8.1 2695,2501.97 2695,3070 v2(2770,3145)
ROW1: KeyPad.1 U2.13
ROW2: KeyPad.2 U2.14
ROW3: KeyPad.3 U2.16
ROW4: KeyPad.4 U2.23
RST: RFID.2
RTS: Q1.2 R11.2 U3.14
RX0: R8.2 U2.34
SCK: RFID.7 U2.30
SCL_I2C: LCD_I2C.4 U2.36
SDA_I2C: LCD_I2C.3 U2.33
servo: Q3.2 Q4.2 R21.1 Servo.1
Source: C2.1 RL1.1 U4.1
SS: RFID.8 U2.29
TX0: R9.2 U2.35
UD+: U3.5 USB1.3
UD-: U3.6 USB1.2
VccUSB: DIO2.2 U3.16
Vcharge: C11.1 C14.1 C17.1 LED2.1 LED3.1 LED4.1 LED5.1 LED6.1 LED7.1 RL2.1 U7.4 U7.8 U10.4 U10.8 U13.4 U13.8 | length 1839.7
  Top Layer w20: LED2.1 2760,2765 LED3.1 2810,2715 ; LED4.1 2732.6,1903.79 2776.38,1860 2872.6,1860 2897.6,1885 LED5.1 2827.6,1979.57 U10.8 ; U10.4 C14.1@3112.6,2129.57 ; U7.4 3108.76,3005.24 C11.1 3204.03,2979 ; C14.1 3301.43,2133.57 3340,2095 LED7.1
  Top Layer w30: 2810,2715 2817.5,2707.5 2890.36,2707.5 2932.86,2750 2998.46,2750 ; U7.8 2880.97,2815 2933.46,2815 2998.46,2750 ; 3204.03,2979 3245,2938.03 3245,2797.46 3197.54,2750 2998.46,2750
VDD3V3: C1.2 C4.1 motor.4 R1.1 R3.2 R4.2 R7.1 RFID.1 U1.2 U2.2
VDD5V: C7.2 C8.2 C9.1 L1.2 LCD_I2C.2 Q3.3 Q4.3 R2.1 RL2.3 Servo.2 T1.3 T2.3 U1.3 U4.4
VIN: JDC1.1 RL1.3 RL1.4
pads on no net: IC1.1 IC1.4 IC1.5 IC1.7 IC1.8 RL2.2 U2.4 U2.5 U2.17 U2.18 U2.19 U2.20 U2.21 U2.22 U2.32 U3.7 U3.8 U3.9 U3.10 U3.11 U3.12 U3.15 U4.6 U5.2 U7.1 U7.GND U8.2 U10.1 U10.GND U11.2 U13.1 U13.GND USB1.0 USB1.4
copper on no net:
  other v3: 5451.39,1854.43 5624.61,1854.43

## Text inside footprints (layer, text, board x,y; h text height)
C2: Top Overlay "+" at 3297,3565 h47.24 r90
U2: Mechanical 13 "ANTENNA" at 4850.39,3745.28 h70